# EAGLE board mrShark 05.a (EAGLE 6.1)
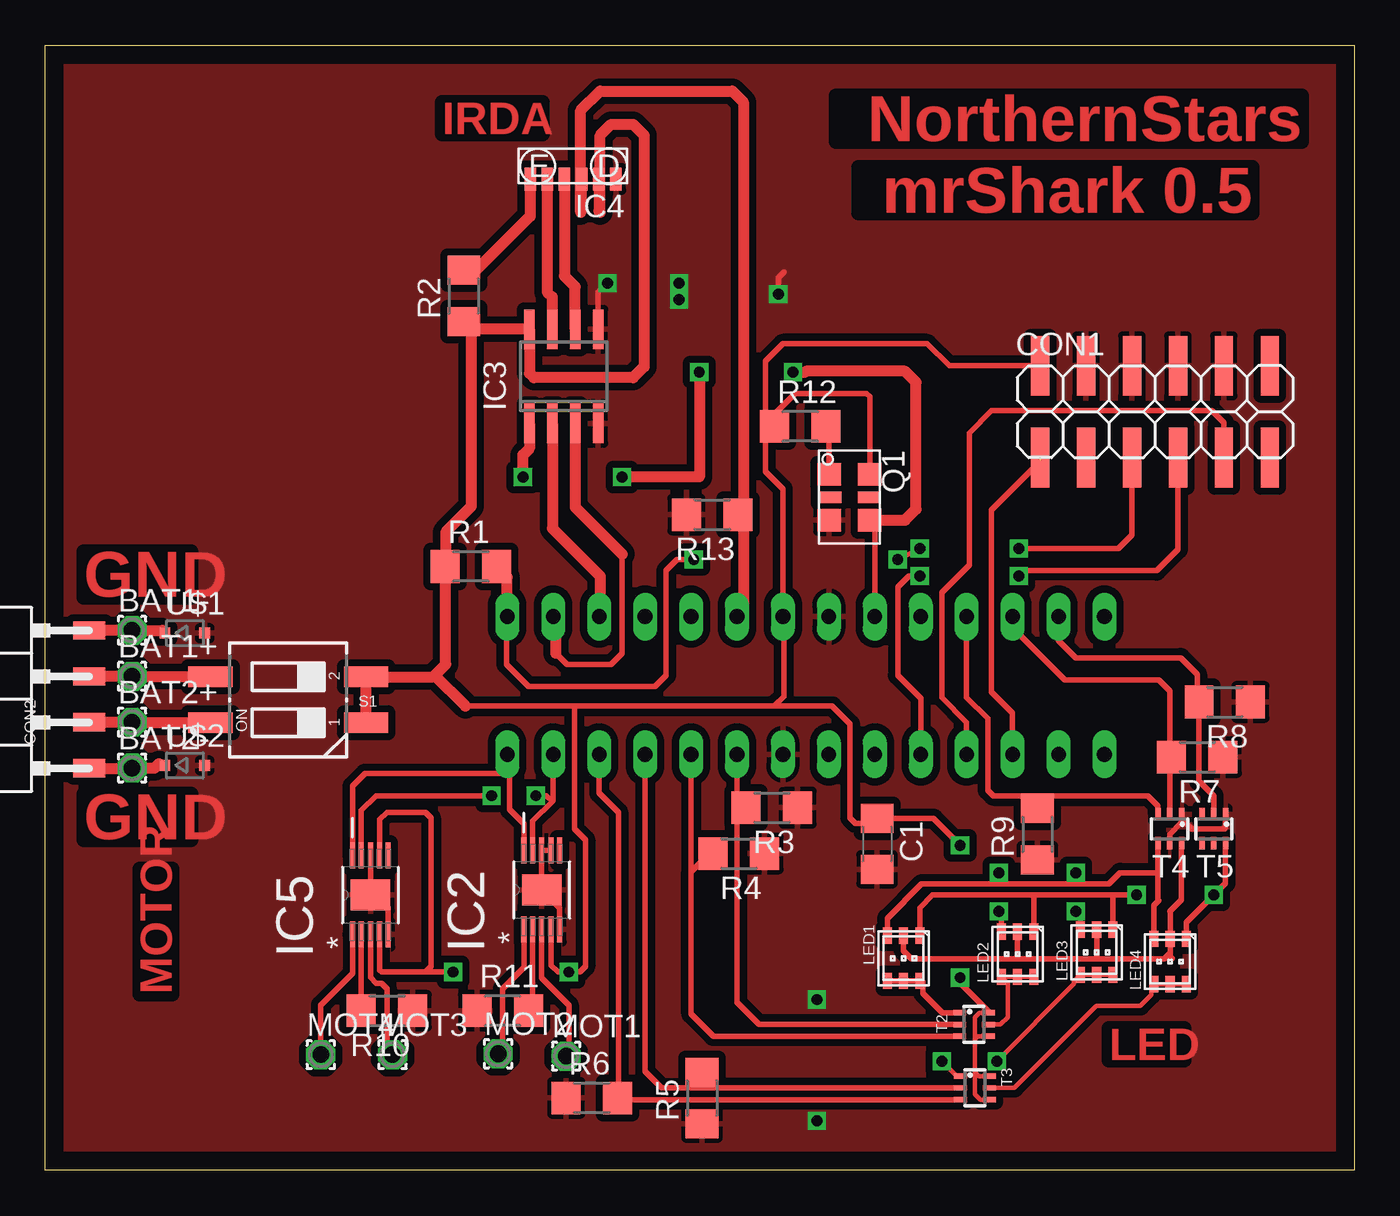
[diagram p0: board, top side]
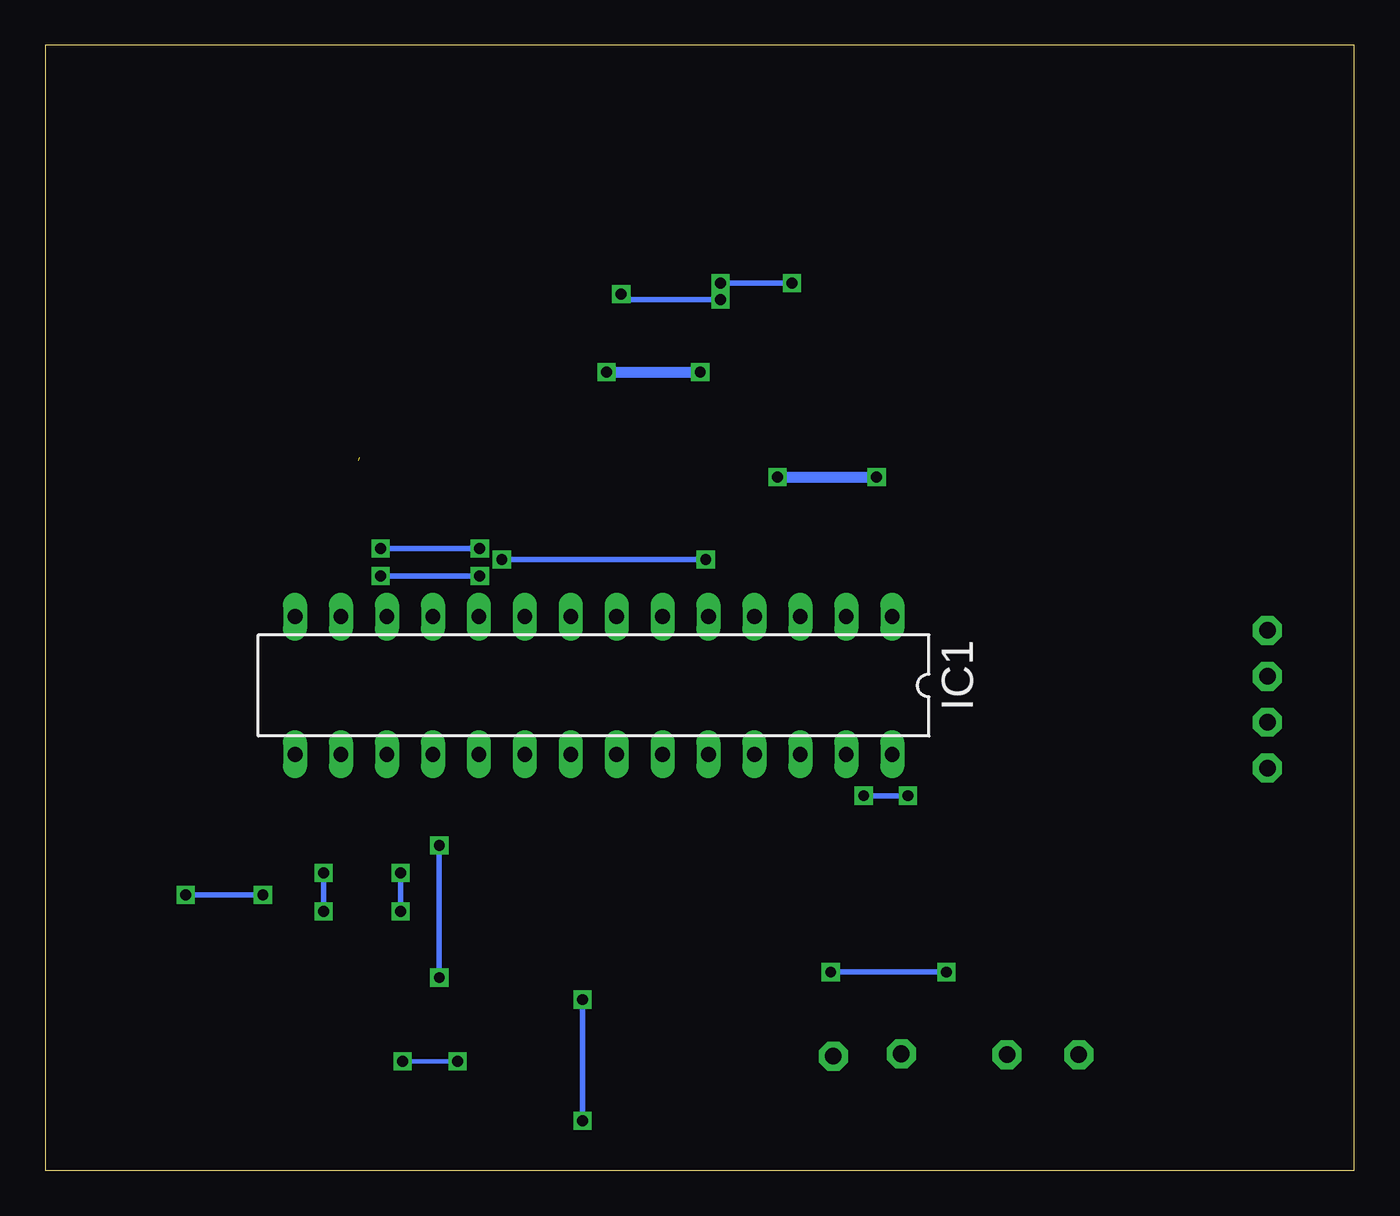
[diagram p1: board, bottom side, seen from below]

Size 72.39 x 62.23 mm. Coordinates in mm from the lower left corner, seen from the top.
Outline: 0,0 0,62.23 72.39,62.23 72.39,0 0,0
Copper layers (1*16): Top 0.035mm / dielectric 1.5mm / Bottom 0.035mm
Design rules: minimum track width 10mil, minimum drill 24mil, track to track 8mil, track to pad 8mil, pad to pad 8mil, via to via 8mil, smd to smd 8mil, copper to edge 40mil, drill to drill 8mil, minimum pad ring 10mil, minimum via ring 8mil, stop-mask expansion 4mil, vias tented up to drill 0mil, thermal gap 10mil

## Footprints (pad centres in the part's own frame; a part is rotated, then mirrored left to right if it is on the bottom)
1,6/0,9 = drill 0.914 pad 1.6 octagon: 1 0,0
C1206 = smd 1.6 x 1.8: 1 -1.4,0; 2 1.4,0
2X06SMD = smd 1.016 x 3.302: 1 -1.27,-3.81; 2 -1.27,1.27; 3 1.27,-3.81; 4 1.27,1.27; 5 3.81,-3.81; 6 3.81,1.27; 7 6.35,-3.81; 8 6.35,1.27; 9 8.89,-3.81; 10 8.89,1.27; 11 11.43,-3.81; 12 11.43,1.27
1X04SMD/90 = smd 1.016 x 1.778: 1 -1.27,-5.08; 2 1.27,-5.08; 3 3.81,-5.08; 4 6.35,-5.08
DIL28-3 = drill 0.813 long: 1 -16.51,-3.81; 2 -13.97,-3.81; 3 -11.43,-3.81; 4 -8.89,-3.81; 5 -6.35,-3.81; 6 -3.81,-3.81; 7 -1.27,-3.81; 8 1.27,-3.81; 9 3.81,-3.81; 10 6.35,-3.81; 11 8.89,-3.81; 12 11.43,-3.81; 13 13.97,-3.81; 14 16.51,-3.81; 15 16.51,3.81; 16 13.97,3.81; 17 11.43,3.81; 18 8.89,3.81; 19 6.35,3.81; 20 3.81,3.81; 21 1.27,3.81; 22 -1.27,3.81; 23 -3.81,3.81; 24 -6.35,3.81; 25 -8.89,3.81; 26 -11.43,3.81; 27 -13.97,3.81; 28 -16.51,3.81
SOP65P640X110-15N = smd 1.422 x 0.279: 1 -2.184,0.991; 2 -2.184,0.508; 3 -2.184,0; 4 -2.184,-0.508; 5 -2.184,-0.991; 6 2.184,-0.991; 7 2.184,-0.508; 8 2.184,0; 9 2.184,0.508; 10 2.184,0.991 | smd 1.727 x 2.184: 11 0,0
SO-08 = smd 0.6 x 2.2: 1 -1.905,-2.6; 2 -0.635,-2.6; 3 0.635,-2.6; 4 1.905,-2.6; 5 1.905,2.6; 6 0.635,2.6; 7 -0.635,2.6; 8 -1.905,2.6
TFBS4711 = smd 0.635 x 1.27: 1 2.37,0.72; 2 1.42,0.72; 3 0.47,0.72; 4 -0.48,0.72; 5 -1.43,0.72; 6 -2.38,0.72
PLCC6 = smd 0.9 x 0.5: 1 1.25,-0.9; 2 1.25,0; 3 1.25,0.9; 4 -1.25,0.9; 5 -1.25,0; 6 -1.25,-0.9
HC536 = smd 1.24 x 1.29: 1 -1.27,-1.125; 2 1.27,-1.125; 3 1.27,1.125; 4 -1.27,1.125 | smd 0.64 x 1.29: TP1 0,1.1; TP2 0,-1.1
R1206 = smd 1.6 x 1.803: 1 -1.422,0; 2 1.422,0
CTS-219-02 = smd 1.13 x 2.44: 1 -1.27,-4.3; 2 1.27,-4.3; 3 1.27,4.3; 4 -1.27,4.3
SOT363_INFINEON = smd 0.3 x 0.7: 1 -0.65,-0.8; 2 0,-0.8; 3 0.65,-0.8; 4 0.65,0.8; 5 0,0.8; 6 -0.65,0.8
SOD323-R = smd 0.6 x 0.6: A 1.1,0; C -1.1,0

## Placement (x,y rotation side)
BAT1+  [1,6/0,9]  4.8,27.33 0 top
BAT1-  [1,6/0,9]  4.8,29.87 0 top
BAT2+  [1,6/0,9]  4.8,24.79 0 top
BAT2-  [1,6/0,9]  4.8,22.25 0 top
C1  100n  [C1206]  46,18.06 270 top
CON1  [2X06SMD]  56.29,43.23 0 top
CON2  [1X04SMD/90]  -2.64,23.51 90 top
IC1  MEGA48/88/168-PU  [DIL28-3]  42.06,26.82 180 bottom
IC2  DRV8830DGQRMSOP  [SOP65P640X110-15N]  27.46,15.52 90 top
IC3  TIR1000PSR  [SO-08]  28.68,43.92 0 top
IC4  TFBS4711TR1  [TFBS4711]  29.18,55.55 180 top
IC5  DRV8830DGQRMSOP  [SOP65P640X110-15N]  17.98,15.24 90 top
LED1  ASMT-YTD2-0BB02  [PLCC6]  47.46,11.73 90 top
LED2  ASMT-YTD2-0BB02  [PLCC6]  53.77,11.96 90 top
LED3  ASMT-YTD2-0BB02  [PLCC6]  58.14,12.06 90 top
LED4  ASMT-YTD2-0BB02  [PLCC6]  62.2,11.56 90 top
MOT1  [1,6/0,9]  28.8,6.32 0 top
MOT2  [1,6/0,9]  25.04,6.45 0 top
MOT3  [1,6/0,9]  19.2,6.4 0 top
MOT4  [1,6/0,9]  15.24,6.4 0 top
Q1  ASFLM1-1.8432MHZ-L-C-T  [HC536]  44.48,37.24 270 top
R1  1k  [R1206]  23.55,33.4 0 top
R2  27R  [R1206]  23.14,48.36 90 top
R3  1k  [R1206]  40.18,20.07 180 top
R4  1k  [R1206]  38.35,17.53 180 top
R5  1k  [R1206]  36.32,4.01 90 top
R6  1k  [R1206]  30.23,4.01 0 top
R7  1k  [R1206]  63.7,22.86 180 top
R8  1k  [R1206]  65.23,25.91 180 top
R9  1k  [R1206]  54.86,18.59 90 top
R10  0.95R  [R1206]  18.9,8.84 180 top
R11  0.95R  [R1206]  25.3,8.84 0 top
R12  1k  [R1206]  41.76,41.15 0 top
R13  1k  [R1206]  36.88,36.27 180 top
S1  MCEMR-02-T  [CTS-219-02]  13.44,26.04 90 top
T2  UMX3NTR  [SOT363_INFINEON]  51.36,8.08 270 top
T3  UMX3NTR  [SOT363_INFINEON]  51.41,4.57 270 top
T4  UMX3NTR-SOT363  [SOT363_INFINEON]  62.18,18.9 180 top
T5  UMX3NTR-SOT363  [SOT363_INFINEON]  64.62,18.9 180 top
U$1  PMEG2010EAR  [SOD323-R]  7.72,29.72 0 top
U$2  PMEG2010EAR  [SOD323-R]  7.72,22.4 0 top

## Library data of the parts
BAT1+ BAT1- BAT2+ BAT2- MOT1-MOT4 = wirepad
C1 R1-R13 = rcl
CON1 CON2 = pinhead-2
IC1 = avr-6
IC2 IC5 = texas; MPN: DRV8830DGQR; OC_FARNELL: 1863106; OC_NEWARK: 58T1482; PACKAGE: MSOP-10; SUPPLIER: TEXAS INSTRUMENTS
IC3 = texas
IC4 = vishay
LED1-LED4 = led
Q1 = crystal
S1 = switch-dil
T2-T5 = transistor-small-signal
U$1 U$2 = diode

## Nets
BAT1+: BAT1+.1 CON2.3 S1.3
BAT1-: BAT1-.1 CON2.4 U$1.C
BAT2+: BAT2+.1 CON2.2 S1.4
BAT2-: BAT2-.1 CON2.1 U$2.C
CLK: IC1.9 IC3.1 Q1.3
COLOR_B: LED1.1 LED2.1 LED3.1 LED4.1 T5.6
COLOR_G: LED1.2 LED2.2 LED3.2 LED4.2 T4.6
COLOR_R: LED1.3 LED2.3 LED3.3 LED4.3 T4.4
GND: C1.2 CON1.4 CON1.6 CON1.8 CON1.10 IC1.8 IC1.22 IC2.5 IC2.7 IC2.8 IC2.11 IC3.4 IC3.5 IC4.6 IC5.5 IC5.8 IC5.11 Q1.2 R3.1 R4.1 R5.1 R6.1 R7.1 R8.1 R9.1 R10.1 R11.1 R13.2 T4.1 T4.5 T5.1 U$1.A U$2.A
INT0: IC1.4
INT1: IC1.5
IR_SD: IC1.6 IC4.4 R13.1
IRDA: IC4.1 R2.2
LED1: IC1.23 R3.2 T2.2
LED1+: LED1.4 LED1.5 LED1.6 T2.1
LED2: IC1.24 R4.2 T2.3
LED2+: LED2.4 LED2.5 LED2.6 T2.5
LED3: IC1.25 R5.2 T3.2
LED3+: LED3.4 LED3.5 LED3.6 T3.1
LED4: IC1.26 R6.2 T3.3
LED4+: LED4.4 LED4.5 LED4.6 T3.5
LED_B: IC1.13 R8.2 T5.2
LED_G: IC1.12 R7.2 T4.2
LED_R: IC1.11 R9.2 T4.3
MISO: CON1.9 IC1.18
MOSI: CON1.1 IC1.17
N$1: IC5.3 MOT3.1
N$2: CON1.3
N$3: IC5.1 MOT4.1
N$4: Q1.1 R12.2
N$5: IC5.2 R10.2
N$6: CON1.11
N$7: IC2.2 R11.2
N$12: CON1.12
N$15: IC2.3 MOT1.1
N$16: IC2.1 MOT2.1
RESET: CON1.5 IC1.1 R1.2
RXD: IC1.2 IC3.3
RXIR: IC3.6 IC4.3
SCK: CON1.7 IC1.19
SCL: IC1.28 IC2.10 IC5.10
SDA: IC1.27 IC2.9 IC5.9
TXD: IC1.3 IC3.2
TXIR: IC3.7 IC4.2
VCC: C1.1 CON1.2 IC1.7 IC2.4 IC3.8 IC4.5 IC5.4 IC5.7 Q1.4 R1.1 R2.1 R12.1 S1.1 S1.2 T2.4 T2.6 T3.4 T3.6

## Tracks (layer width: path | path; a pad name or v marks a point on that pad's centre or on a via)
BAT1+
  Top 0.61: CON2.3 BAT1+.1 8.55,27.33 S1.3
BAT1-
  Top 0.61: CON2.4 BAT1-.1 6.47,29.87 U$1.C
BAT2+
  Top 0.61: CON2.2 BAT2+.1 8.55,24.79 S1.4
BAT2-
  Top 0.61: CON2.1 4.21,22.24 4.47,22.5 4.72,22.25 BAT2-.1 6.04,22.25 6.3,22.5 6.4,22.4 U$2.C
CLK  (via drill 0.6)
  Top 0.305: IC1.9 45.87,35.51 45.41,35.97 Q1.3 45.72,35.97
  Top 0.61: v36.17,44.15 36.17,38.35 v31.9,38.35 | v26.42,38.35 26.42,39.57 26.77,39.93 IC3.1 | 45.41,35.97 47.55,35.97 48.16,36.58 48.16,43.59 47.55,44.2 42.06,44.2 42.01,44.15 v41.35,44.15
  Bottom 0.61: v41.35,44.15 v36.17,44.15 | v31.9,38.35 v26.42,38.35
COLOR_B  (via drill 0.6)
  Top 0.305: T5.6 65.27,15.89 v64.62,15.24 63.09,13.72 LED4.1 | LED1.1 48.37,14.53 49.07,15.24 54.56,15.24 | 54.56,15.24 59.13,15.24 | 59.13,15.24 v60.35,15.24 | LED3.1 59.04,15.15 59.13,15.24 | LED2.1 54.67,15.13 54.56,15.24
  Bottom 0.305: v60.35,15.24 v64.62,15.24
COLOR_G
  Top 0.305: LED1.2 47.47,12.15 47.9,11.71 53.62,11.71 | 53.62,11.71 58.06,11.71 | 58.06,11.71 61.87,11.71 62.2,12.04 | 62.2,12.04 LED4.2 62.2,14.3 62.18,14.33 62.83,14.98 T4.6 | LED3.2 58.14,11.79 58.06,11.71 | LED2.2 53.77,11.86 53.62,11.71 | 62.33,11.73 62.18,11.89 62.2,11.91 62.2,12.04
COLOR_R  (via drill 0.6)
  Top 0.305: LED4.3 61.3,14.67 61.57,14.94 61.53,14.98 61.53,16.46 | T4.4 61.53,16.46 | LED1.3 46.56,13.95 48.46,15.85 52.43,15.85 | 52.43,15.85 57,15.85 | 57,15.85 58.83,15.85 59.44,16.46 61.53,16.46 | LED2.3 52.87,14.18 v52.73,14.33 | v52.73,16.46 52.73,16.15 52.43,15.85 | LED3.3 57.24,14.08 v57,14.33 | v57,16.46 57,15.85
  Bottom 0.305: v52.73,14.33 v52.73,16.46 | v57,14.33 v57,16.46
GND  (via drill 0.6)
  Top 0.305: IC3.5 30.58,48.56 v31.09,49.07 | v35.05,49.07 v35.05,48.16 | v40.54,48.46 40.54,49.38 40.84,49.68 | IC2.5 28.45,14.53 IC2.11 27.43,15.54 27.46,15.57 IC2.8 IC2.7 | IC5.8 IC5.11 18.29,14.94 18.59,14.94 18.97,14.55 IC5.5 | T4.5 62.18,18.59 62.83,19.24 T4.1 62.83,19.47 63.4,18.9 65.23,18.9 65.27,18.94 T5.1
  Bottom 0.305: v31.09,49.07 v35.05,49.07 | v35.05,48.16 40.23,48.16 v40.54,48.46 | v42.67,9.45 v42.67,2.74
  pour Top (isolate 0.406): 0,0 0,62.23 72.39,62.23 72.39,0
IR_SD
  Top 0.406: 38.61,30.99 38.61,35.97 R13.1
  Top 0.61: IC4.4 29.62,52.98 29.62,58.62 30.68,59.69 38,59.69 38.61,59.08 38.61,30.99 IC1.6
IRDA
  Top 0.61: R2.2 23.82,49.78 26.82,52.77 IC4.1
LED1
  Top 0.305: T2.2 39.47,8.08 38.25,9.3 IC1.23 38.25,20.57 R3.2
LED1+
  Top 0.305: LED1.4 LED1.5 LED1.6 48.49,10.48 48.54,10.44 48.54,9.8 49.62,8.73 T2.1
LED2
  Top 0.305: T2.3 36.95,7.43 35.71,8.66 35.71,16.51 | IC1.24 35.71,16.51 | 35.71,16.51 36.88,17.68 36.93,17.63 R4.2
LED2+
  Top 0.254: T2.5 52.83,8.08 53.24,8.48 53.24,10.35 LED2.4 LED2.5 LED2.6
LED3
  Top 0.305: T3.2 36.27,4.57 | IC1.25 33.17,5.49 34.09,4.57 36.27,4.57 | 36.27,4.57 36.27,5.49 | 36.27,5.49 36.58,5.49 | R5.2 36.27,5.49
LED3+  (via drill 0.6)
  Top 0.254: T3.1 50.4,5.22 v49.58,6.04 | v52.63,6.04 56.9,10.31 56.9,10.47 LED3.4 LED3.5 LED3.6
  Bottom 0.254: v49.58,6.04 v52.63,6.04
LED4
  Top 0.305: IC1.26 30.63,20.88 31.7,19.81 31.7,4.57 | 31.7,4.57 32.35,3.92 T3.3 | R6.2 31.65,4.52 31.7,4.57
LED4+
  Top 0.254: T3.5 53.59,4.57 58.12,9.09 60.55,9.09 61.16,9.7 61.16,10.17 LED4.4 LED4.5 LED4.6
LED_B
  Top 0.305: IC1.13 56.03,29.31 57,28.35 62.79,28.35 63.7,27.43 63.7,26.01 R8.2 63.8,21.54 64.62,20.73 T5.2
LED_G
  Top 0.305: IC1.12 53.49,30.02 56.39,27.13 61.57,27.13 62.18,26.52 62.18,22.86 | 62.18,22.86 T4.2 | R7.2 62.18,22.86
LED_R
  Top 0.305: IC1.11 50.95,26.16 52.12,24.99 52.12,21.03 52.43,20.73 54.56,20.73 54.86,20.73 | 54.86,20.73 60.96,20.73 61.53,20.16 T4.3 | R9.2 54.86,20.73
MISO
  Top 0.305: IC1.18 50.95,24.79 49.58,26.16 49.58,31.95 51.1,33.48 51.1,40.79 52.32,42.01 64.52,42.01 65.18,41.35 CON1.9
MOSI  (1 unrouted)
  Top 0.305: IC1.17 53.49,25.3 52.32,26.47 52.32,36.52 55.07,39.27 55.07,39.57
N$1
  Top 0.305: IC5.3 17.98,10.67 18.29,10.36 18.59,10.36 18.9,10.06 18.9,6.71 MOT3.1
N$3
  Top 0.305: IC5.1 16.99,10.9 15.24,9.14 MOT4.1
N$4
  Top 0.305: Q1.1 43.35,40.98 R12.2
N$5
  Top 0.305: IC5.2 R10.2
N$7
  Top 0.305: IC2.2 26.95,9.07 R11.2
N$15
  Top 0.305: IC2.3 27.46,10.64 28.96,9.14 28.96,6.48 MOT1.1
N$16
  Top 0.305: IC2.1 26.47,11.23 25.3,10.06 25.3,6.71 MOT2.1
RESET  (via drill 0.6)
  Top 0.305: CON1.5 60.1,35.15 59.33,34.39 v53.85,34.39 | v48.36,34.39 v47.14,33.78 | v35.87,33.78 34.95,33.78 34.34,33.17 34.34,27.38 33.73,26.77 26.72,26.77 25.5,27.99 25.5,30.43 | 25.5,30.43 25.5,30.73 | IC1.1 25.55,30.48 25.5,30.43
  Top 0.61: IC1.1 25.55,32.82 R1.2
  Bottom 0.305: v53.85,34.39 v48.36,34.39 | v47.14,33.78 v35.87,33.78
RXD
  Top 0.305: 31.9,34.09 31.9,28.6 31.29,27.99 28.85,27.99 28.25,28.6
  Top 0.61: IC3.3 29.31,36.68 31.9,34.09 | 28.25,28.6 28.25,30.48 IC1.2
RXIR
  Top 0.61: IC3.6 29.31,48.87 28.71,49.47 IC4.3
SCK  (via drill 0.6)
  Top 0.305: CON1.7 62.64,34.34 61.47,33.17 54.15,33.17 v53.85,32.87 | v48.36,32.87 47.75,32.87 47.14,32.26 47.14,27.38 48.41,26.11 IC1.19
  Bottom 0.305: v53.85,32.87 v48.36,32.87
SCL
  Top 0.305: IC2.10 26.47,19.18 25.68,19.96 25.68,22.89 IC1.28 25.6,22.96 25.6,21.95 17.68,21.95 16.99,21.26 IC5.10
SDA  (via drill 0.6)
  Top 0.305: IC2.9 26.95,19.33 28.04,20.42 | 28.04,20.42 28.09,20.47 IC1.27 | IC5.9 17.48,19.91 18.29,20.73 v24.69,20.73 | v27.13,20.73 27.74,20.73 28.04,20.42
  Bottom 0.305: v24.69,20.73 v27.13,20.73
TXD
  Top 0.61: IC3.2 28.04,35.51 30.68,32.87 30.68,30.43 30.63,30.48 IC1.3
TXIR
  Top 0.61: IC3.7 28.04,48.31 27.77,48.59 IC4.2
VCC  (via drill 0.6)
  Top 0.254: T2.6 51.65,8.73 51.41,8.48 51.41,7.26 | 51.41,7.26 51.41,5.44 | 51.41,5.44 51.41,4.22 51.7,3.92 T3.4 | T3.6 51.62,5.22 51.41,5.44 | T2.4 51.57,7.43 51.41,7.26
  Top 0.305: 39.83,41.55 39.83,38.66 40.79,37.69 IC1.7 40.84,30.58 40.84,26.21 40.31,25.68 | 29.18,25.68 40.31,25.68 | IC2.4 27.96,11.35 28.35,10.97 v28.96,10.97 29.57,10.97 29.87,11.28 29.87,18.29 29.26,18.9 29.26,25.6 29.18,25.68 | 23.24,25.68 29.18,25.68 | 40.31,25.68 43.51,25.68 44.5,24.69 44.5,19.51 44.81,19.2 45.74,19.2 C1.1 49.12,19.46 v50.6,17.98 | IC5.4 18.49,11.07 18.59,10.97 21.03,10.97 | 21.03,10.97 v22.55,10.97 | IC5.7 18.49,19.41 18.9,19.81 21.03,19.81 21.34,19.51 21.34,11.28 21.03,10.97 | 39.83,41.66 39.83,44.76 40.79,45.72 48.77,45.72 49.99,44.5 CON1.2 | 39.83,41.66 R12.1 | Q1.4 45.6,42.79 45.41,42.98 41.45,42.98 39.93,41.45 39.83,41.55 | 39.83,41.66 39.83,41.55 | v50.6,10.67 50.6,10.36 52.16,8.8 T2.6
  Top 0.61: S1.1 S1.2 21.46,27.3 21.54,27.38 | 23.56,46.52 IC3.8 26.77,44.09 27.03,43.84 32.51,43.84 33.12,44.45 33.12,57.25 32.51,57.86 31.29,57.86 30.68,57.25 30.68,52.98 30.61,53.05 IC4.5 | 23.56,46.52 R2.1 | 23.56,46.52 23.56,36.72 22.15,35.31 22.15,33.43 R1.1 22.15,33.38 22.15,27.99 21.54,27.38 | 23.24,25.68 21.54,27.38 | 45.87,19.59 C1.1
  Bottom 0.305: v22.55,10.97 v28.96,10.97 | v50.6,17.98 v50.6,10.67

## Text on the board
Top: NorthernStars | IRDA | mrShark 0.5 | GND | GND | MOTOR | LED